# Altium PCB 2020年电赛校赛.PcbDoc (part 2 of 2)
Units mil, origin at the board's own origin, x right, y up, seen from the top; angles counter-clockwise.
Board outline 6325.03 x 2765.03 mil, 2 copper layers (Top Layer, Bottom Layer); 190 components, 62 nets, 601 pads, 1 vias.
Unrouted connection lines stored in the file: 82.
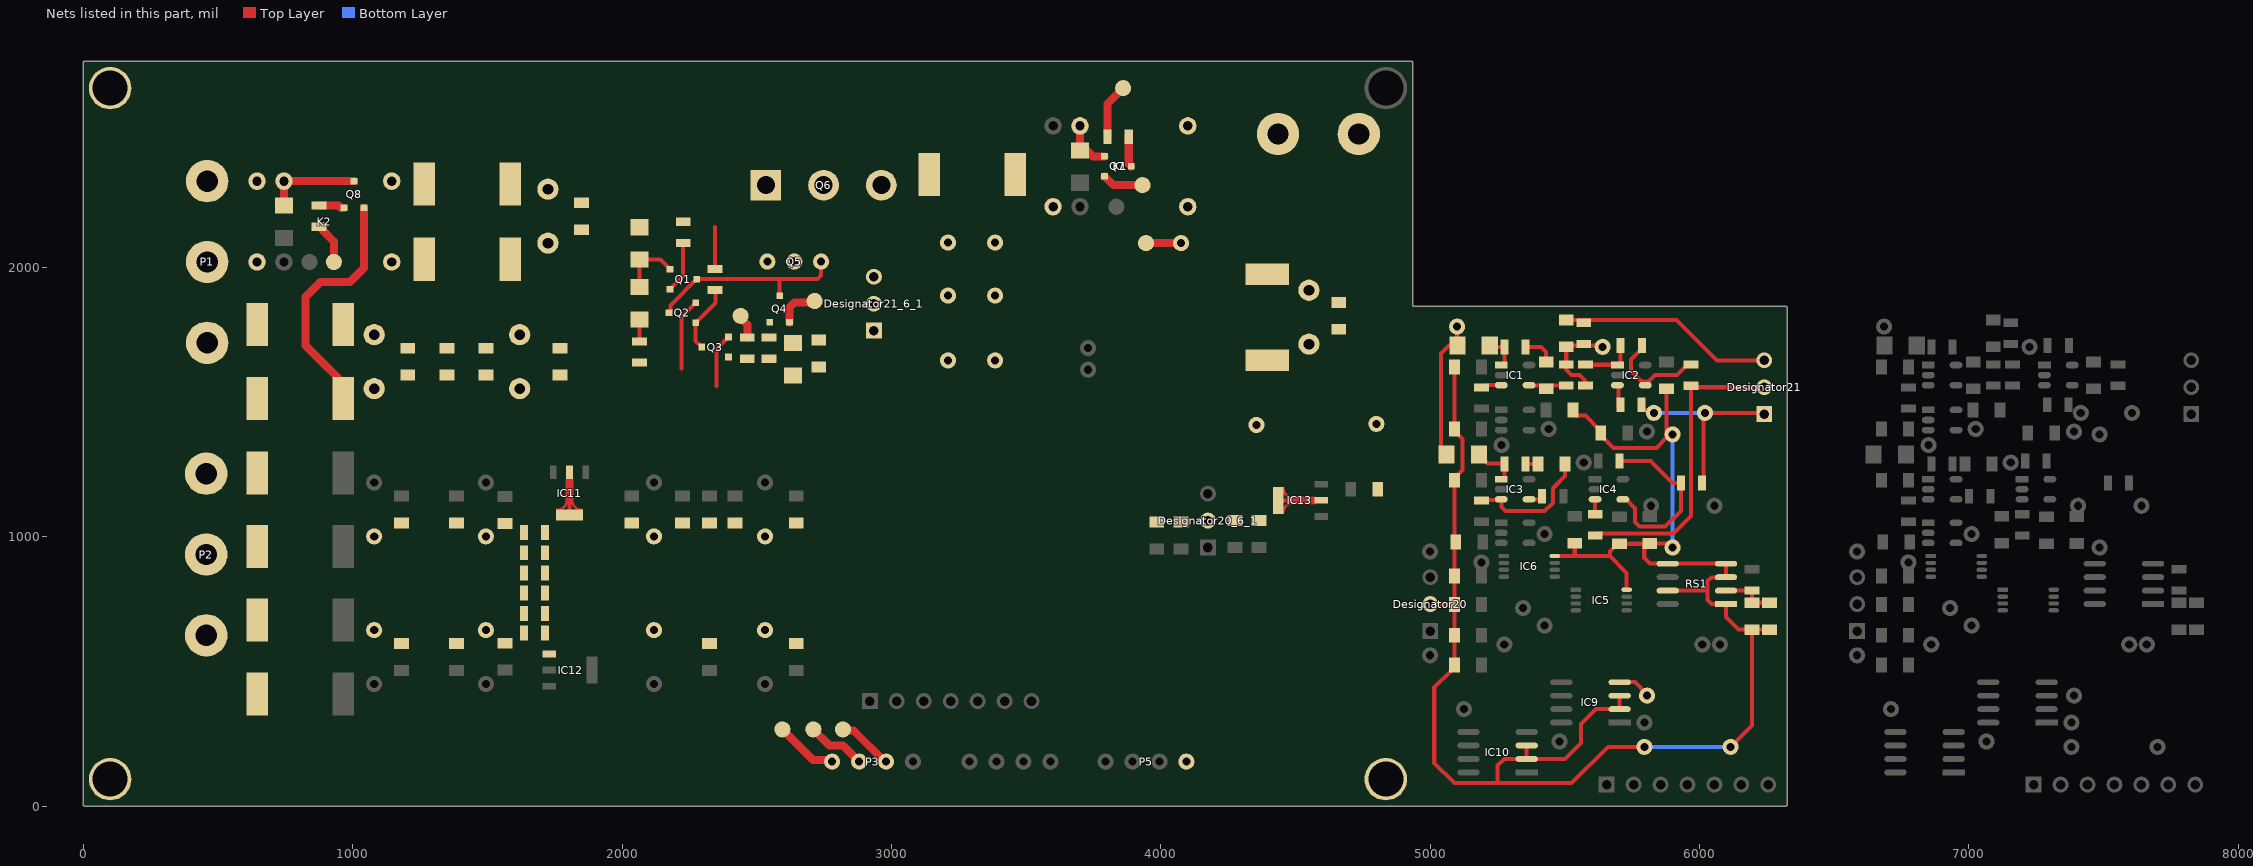
[diagram p2: the nets of this part, all layers, seen from the top]

## Via types
v1: diameter 50, hole 28, Top Layer to Bottom Layer, 1 vias

## Nets (pads, with @x,y where several pads share a name; then routed paths per layer and width w, separated by ;. In a path a pad name is that pad's centre, name@x,y a point inside that pad or via, vN(x,y) a via of type N, cw(c..) or ccw(c..) an arc to the next point about the centre after c; other vN are vias at no path point) (continued)
GND: C1.2 C2.1 C3.1 C5.1 C6.1 C7.1 C8.1 C11.1 C12.1 C13.1 C14.1 C17.2 C18.2 C19.1 C20.1 C21.1 C22.1 C25.1 C26.1 C27.2 C28.2 C29.2 C30.2 C31.1 C32.1 C33.1 C34.1 C35.2 C36.2 C37.1 C38.1 C39.1 C40.1 C41.1 C42.2 C43.2 C44.2 C45.2 C46.2 C47.1 C48.1 C49.1 C50.1 C51.2 C52.2 C54.1 C56.1 C57.1 C58.1 C60.1 C61.1 D3.2 D12.1 D13.1 Designator20.2 Designator20_6_1.2 Designator21.1 Designator21_6_1.3@2935,1765 IC5.8 IC6.8 IC9.2 IC9.3 IC10.2 IC10.3 IC11.2 IC12.1 IC13.2 L2.1 L2.2 L3.1 L3.2 L4.1 L4.2 L5.1 L5.2 L6.1 L6.2 L7.1 L7.2 P2.2 P5.1 pad.72@5900,1380 pad.79@6020,1460 pad.80@5830,1460 pad.89@5900,960 pad.97@5795,220 pad.98@6115,220 pad.110@100,100 pad.110@100,2665 pad.110@4835,100 pad.115 pad.116 pad.117 Q2.3 Q3.3 Q7.3 Q8.3 R3.1 R5.1 R6.1 R7.1 R15.1 R21.1 R23.2 RS1.1 RS1.3 RS1.4 RS1.5 RS1.7 | length 8919.5
  Top Layer w15: 2220,1625 2220,1814.97 Q2.3@2273.15,1868.12 ; 2350,1560 2350,1696.05 Q3.3@2395.11,1741.16 ; Designator20.2@5000,750 5088.98,750 C58.1@5090,748.98 ; C7.1@5090,1630 C22.1@5090,1400 5090,1392.5 5120,1362.5 5120,1247.5 5090,1217.5 C5.1@5090,1210 C18.2@5090,854.08 C58.1@5090,748.98 ; IC10.3@5358.27,225 IC10.2@5358.27,175 ; IC6.8@5462.66,928.39 5535,928.39 ; C8.1@5530,1470 5530,1462.5 5542.5,1450 5575.93,1450 5629.07,1396.86 5629.07,1389.36 C12.1@5633.14,1385.29 5645.64,1372.79 5645.64,1364.36 5680,1330 5840,1330 5877.73,1367.73 C11.1@5877.73,1548.98 ; C19.1@5536.61,975.87 5536.61,929.99 5535,928.39 ; IC9.3@5703.27,410 IC9.2@5703.27,360 5615,360 5560,305 5560,235 5500,175 IC10.2@5358.27,175 ; IC5.8@5717.3,804.27 IC5.8@5718.18,803.39 ; IC5.8@5729.49,803.39 5729.49,865.51 5666.61,928.39 ; R21.1@5785,1489.59 R21.1@5784.38,1490.21 5784.38,1477.71 5791.88,1470.21 5804.38,1470.21 5805.98,1468.61 5821.39,1468.61 pad.80@5830,1460 ; pad.97@5795,220 5660,220 5525,85 5250,85 ; C13.1@5815,975 5872.82,975 5887.82,960 pad.89@5900,960 ; RS1.7@5881.73,800 6030,800 ; R15.1@6015,1225 pad.79@6015,1475 ; pad.79@6020,1460 6235,1460 Designator21.1@6240,1455 ; pad.98@6115,220 6195,300 C56.1@6195,655 ; C57.1@6260,655 C56.1@6195,655 ; C58.1@5090,748.98 C17.2@5090,634.13 C21.1@5090,523.43 5077.5,510.93 5077.5,502.5 5015,440 5015,160 5090,85 5250,85 ; 5250,85 5250,150 5275,175 IC10.2@5358.27,175 ; 5535,928.39 5666.61,928.39 ; 5666.61,928.39 5666.61,945.17 5695.51,974.07 C14.1@5703.01,974.07 5703.07,974.02 5794.57,974.02 5794.62,973.96 5794.62,920.38 5815,900 RS1.5@5881.73,900 RS1.4@6098.27,900 RS1.3@6098.27,850 6097,848.73 6043.73,848.73 6030,835 6030,800 ; 6030,800 6030,765 6045,750 RS1.1@6098.27,750 6098.27,701.73 6145,655 C56.1@6195,655
  Top Layer w30: D12.1@957.7,1577.7 862.7,1672.7 862.3,1672.7 825,1710 825,1890 880,1945 990,1945 1042,1997 Q8.3@1042,2221 ; Q7.3@3791,2338 3824,2305 pad.115@3931.88,2305
  Bottom Layer w15: pad.97@5795,220 pad.98@6115,220 ; pad.80@5830,1460 pad.79@6020,1460 ; pad.89@5900,960 pad.72@5900,1380
Limit: P3.3 pad.105 pad.112 R4.1 | length 310.7
  Top Layer w30: pad.112@2440,1820 2440,1811.88 2465,1786.88 R4.1@2465,1739.38 ; pad.105@2710,285 2770,225 2820,225 P3.3@2880,165
NetC3_2: C3.2 D3.1 Q4.1 R5.2
NetC4_1: C4.1 R11.2 | length 45.6
  Top Layer w15: R11.2@5354.36,1270 C4.1@5400,1270
NetC4_2: C4.2 IC3.3 R13.1 | length 477.2
  Top Layer w15: R13.1@5190,1134.31 5192.7,1137 5262.02,1137 IC3.3@5263.82,1138.8 5263.82,1111.18 5280,1095 5425,1095 5455,1125 5455,1180 5500,1225 C4.2@5500,1270
NetC9_1: C9.1 R8.2 | length 122
  Top Layer w15: R8.2@5354.36,1704.2 5410.81,1704.2 5430,1685 5430,1660.7 C9.1@5440,1650.7
NetC9_2: C9.2 IC1.4 R9.1 | length 175.5
  Top Layer w15: IC1.4@5366.97,1562.6 5367.96,1561.61 C9.2@5413.93,1561.61 ; C9.2@5418.55,1561.6 5423.95,1556.2 C9.2@5431.05,1549.1 ; C9.2@5429.23,1561.48 5414.06,1561.48 C9.2@5413.93,1561.61 ; R9.1@5509.01,1561.61 5429.23,1561.61 C9.2@5413.93,1561.61
NetC10_2: C10.2 C15.1 C16.2 D6.1 D7.2 Designator21.3 Designator21_6_1.3@2935,1965 K1.1 Q6.3 R6.2 R7.2 R17.2 | length 797.1
  Top Layer w15: C10.2@5505,1805 5570,1805 5915,1805 6065,1655 Designator21.3@6240,1655
NetC56_2: C56.2 C57.2 L1.1 RS1.2 | length 207.6
  Top Layer w15: RS1.2@6098.27,800 6098.58,800.31 6194.69,800.31 L1.1@6195,800.62 C56.2@6195,755 C57.2@6260,755
NetD1_2: D1.2 D2.1 Q1.1 | length 230.1
  Top Layer w15: D2.1@2065,1926.66 D1.2@2065,2028.98 2141.95,2028.98 Q1.1@2177.92,1993
NetD2_2: D2.2 R3.2 | length 81.3
  Top Layer w15: R3.2@2065,1725.28 D2.2@2065,1806.58
NetD4_1: D4.1 D5.1 pad.102@4075,2090 pad.102@5100,1780 pad.113 pad.114 Q4.3 | length 832.2
  Top Layer w15: D4.1@5040,1280 5040,1680 5070,1710 D5.1@5100.94,1710 5100,1710.94 pad.102@5100,1780
  Top Layer w30: Q4.3@2622,1796 Q4.3@2622,1796 2621.95,1851.69 2639.53,1869.26 2709.26,1869.26 pad.113@2715,1875 ; pad.114@3945,2090 pad.102@4075,2090
NetD4_2: D4.2 IC3.1 R11.1 | length 183.5
  Top Layer w15: D4.2@5181.02,1305 5181.02,1302 5203.52,1279.5 5206.52,1279.5 5213.52,1272.5 5275.62,1272.5 R11.1@5275.62,1270 R11.1@5275.62,1261.92 ; D4.2@5195,1305 D4.2@5200,1310 ; IC3.1@5263.82,1213.61 5270.92,1213.61 5275.62,1218.31 R11.1@5275.62,1260.59
NetD5_2: D5.2 IC1.1 R8.1 | length 136.3
  Top Layer w15: D5.2@5221.02,1710 5226.02,1705 5268.12,1705 R8.1@5272.28,1700.85 ; IC1.1@5260,1641.22 IC1.1@5263.82,1637.4 5270.92,1637.4 5275.62,1642.11 R8.1@5275.62,1704.2
NetD8_1: D8.1 K1.5 Q7.1 | length 181.7
  Top Layer w30: K1.5@3700,2525 3700,2450 3710,2450 3748,2412 Q7.1@3791,2412
NetD9_1: D9.1 K2.5 Q8.2 | length 350.9
  Top Layer w30: D9.1@745,2229.06 K2.5@745,2320 Q8.2@1005,2320
NetD10_1: D10.1 D13.2 K2.3 K2.4
NetD11_1: D11.1 D12.2 P1.1
NetD14_1: D14.1 D15.2 P2.3
NetD16_1: D16.1 D17.2 P2.1
NetIC1_3: IC1.3 R10.1 | length 77.2
  Top Layer w15: R10.1@5190,1554.38 5197.5,1561.88 5218.07,1561.88 5218.79,1562.6 IC1.3@5263.82,1562.6
NetIC2_1: IC2.1 R18.2 R19.2 | length 201.8
  Top Layer w15: R18.2@5571.16,1640.28 R18.2@5571.5,1639.94 ; R18.2@5576.18,1638.38 5694.03,1638.38 IC2.1@5695.01,1637.4 5702.12,1637.4 5706.82,1642.11 R19.2@5706.82,1710.47
NetIC2_3: IC2.3 R21.2 | length 88.7
  Top Layer w15: IC2.3@5695.01,1562.6 5698.75,1558.85 5698.75,1480.75 R21.2@5702.5,1477
NetIC2_4: IC2.4 R19.1 R20.2 | length 376.8
  Top Layer w15: R19.1@5785.56,1710.47 5785.56,1697.97 5745,1657.41 5745,1615.75 5784.54,1576.21 5811.21,1576.21 5835,1600 5915.84,1600 5955.21,1639.36 R20.2@5967.71,1639.36
NetIC3_4: IC3.4 R12.1 | length 55.5
  Top Layer w15: IC3.4@5366.97,1138.8 5408.12,1138.8 5415.62,1146.3 R12.1@5415.62,1150
NetIC4_3: IC4.3 R16.2 | length 55.8
  Top Layer w15: IC4.3@5611.96,1138.8 5611.96,1084.49 R16.2@5613.01,1083.43
NetIC4_4: IC4.4 R14.1 R15.2 | length 677.7
  Top Layer w15: R14.1@5702.51,1280.58 5820,1280.58 5820,1280 5900,1200 R15.2@5930.64,1200 5930.64,1095.64 5872.3,1037.3 5777.7,1037.3 5760,1055 5760,1105.72 5729.99,1135.73 5718.18,1135.73 IC4.4@5715.11,1138.8
NetK2_1: K2.1 P1.2
NetK2_6: K2.6 P1.3
NetQ1_2: Q1.2 Q2.2 Q4.2 Q5.3 | length 748.5
  Top Layer w15: Q2.2@2174.15,1831.12 2179.15,1836.12 2179.15,1858.22 Q1.2@2276.92,1956 2585,1956 ; Q4.2@2585,1895 2585,1956 ; Q5.3@2739.26,2021.51 2739.26,1969.26 2726,1956 2585,1956
NetQ1_3: Q1.3 R1.1 | length 191.9
  Top Layer w15: Q1.3@2177.92,1919 2226.92,1968 R1.1@2226.92,2090.62
NetQ2_1: Q2.1 Q3.2 R2.1 | length 274.3
  Top Layer w15: Q3.2@2296.11,1704.16 2273.15,1727.13 Q2.1@2273.15,1794.12 2346.11,1867.08 2346.11,1916.2 R2.1@2346.11,1921.82 ; R2.1@2341.11,1916.2 R2.1@2346.42,1921.51 ; R2.1@2346.42,1916.51 R2.1@2353.03,1923.12
NetQ3_1: Q3.1 R4.2
NetQ5_1: Q5.1 Q6.1 | length 8
  Top Layer w15: Q6.1@2533.59,2305 Q6.1@2539.26,2299.33
NetQ7_2: Q7.2 R22.1 | length 113.8
  Top Layer w30: R22.1@3880.88,2485.07 3880.88,2384.12 Q7.2@3890,2375
NetQ8_1: Q8.1 R24.1 | length 98.1
  Top Layer w15: R24.1@875,2229.38 R24.1@876.19,2228.19
  Top Layer w30: R24.1@875,2229.38 947.5,2229.38 955.88,2221 Q8.1@968,2221
OFF: P3.2 pad.106 pad.111 R22.2 | length 413.6
  Top Layer w30: pad.106@2820,285 2825,280 2860,280 2975,165 P3.2@2980,165 ; R22.2@3802.14,2485.07 3802.14,2607.14 pad.111@3860,2665
SW: P3.4 pad.104 pad.109 R24.2 | length 395.4
  Top Layer w30: R24.2@875,2150.64 887.5,2150.64 887.5,2138.14 930,2095.64 pad.109@930,2020 ; pad.104@2595,285 2709.26,170.74 2774.26,170.74 P3.4@2780,165
Uout+: K1.3 K1.4 P6.2
Uout-: C15.2 C16.1 D7.1 Designator21.2 Designator21_6_1.2 P6.1 R16.1 R20.1 R23.1 | length 1142.5
  Top Layer w15: R16.1@5613.01,1004.69 5620.51,1012.19 5641.29,1012.19 5641.8,1012.7 5902.7,1012.7 5967.71,1077.71 5967.71,1555 R20.1@5967.71,1560.62 5973.33,1555 Designator21.2@6240,1555
V+: C1.1 C2.2 C29.1 C30.1 C31.2 C32.2 C33.2 C34.2 D1.1 D6.2 D10.2 D11.2 Q5.2 Q6.2 R1.2 R2.2 | length 155.6
  Top Layer w15: R2.2@2345,1994.36 2345,2150
VIN: C10.1 IC9.4 pad.73@5640,1705 pad.93@5805,410 R9.2 R17.1 R18.1 | length 432.9
  Top Layer w15: R9.2@5500,1634.84 5505,1629.84 5505,1620 5525,1600 5555,1600 5575,1580 5575,1562.44 R18.1@5576.18,1561.26 ; R9.2@5504.99,1639.69 C10.1@5505,1705 ; C10.1@5525,1710.31 5569.68,1710.31 R17.1@5570,1710.62 ; R17.1@5570,1715.62 5575.31,1710.31 5634.69,1710.31 pad.73@5640,1705 ; IC9.4@5703.27,460 5760,460 5805,415 pad.93@5805,410
pads on no net: C4_1.1 C4_1.2 C5_1.1 C5_1.2 C7_1.1 C7_1.2 C8_1.1 C8_1.2 C9_1.1 C9_1.2 C10_1.1 C10_1.2 C11_1.1 C11_1.2 C12_1.1 C12_1.2 C13_1.1 C13_1.2 C14_1.1 C14_1.2 C17_1.1 C17_1.2 C18_1.1 C18_1.2 C19_1.1 C19_1.2 C20_1.1 C20_1.2 C21_1.1 C21_1.2 C22_1.1 C22_1.2 C56_1.1 C56_1.2 C57_1.1 C57_1.2 C58_1.1 C58_1.2 D4_1.1 D4_1.2 D5_1.1 D5_1.2 Designator19_1.1 Designator19_1.2 Designator19_1.3 Designator19_1.4 Designator19_1.5 Designator19_1.6 Designator19_1.7 Designator20_1.1 Designator20_1.2 Designator20_1.3 Designator21_1.1 Designator21_1.2 Designator21_1.3 IC1_1.1 IC1_1.2 IC1_1.3 IC1_1.4 IC1_1.5 IC2_1.1 IC2_1.2 IC2_1.3 IC2_1.4 IC2_1.5 IC3_1.1 IC3_1.2 IC3_1.3 IC3_1.4 IC3_1.5 IC4_1.1 IC4_1.2 IC4_1.3 IC4_1.4 IC4_1.5 IC5_1.1 IC5_1.2 IC5_1.3 IC5_1.4 IC5_1.5 IC5_1.6 IC5_1.7 IC5_1.8 IC6_1.1 IC6_1.2 IC6_1.3 IC6_1.4 IC6_1.5 IC6_1.6 IC6_1.7 IC6_1.8 IC7_1.1 IC7_1.2 IC7_1.3 IC7_1.4 IC7_1.5 IC8_1.1 IC8_1.2 IC8_1.3 IC8_1.4 IC8_1.5 IC9_1.1 IC9_1.2 IC9_1.3 IC9_1.4 IC9_1.5 IC9_1.6 IC9_1.7 IC9_1.8 IC10_1.1 IC10_1.2 IC10_1.3 IC10_1.4 IC10_1.5 IC10_1.6 IC10_1.7 IC10_1.8 K1.6 L1_1.1 L1_1.2 R8_1.1 R8_1.2 R9_1.1 R9_1.2 R10_1.1 R10_1.2 R11_1.1 R11_1.2 R12_1.1 R12_1.2 R13_1.1 R13_1.2 R14_1.1 R14_1.2 R15_1.1 R15_1.2 R16_1.1 R16_1.2 R17_1.1 R17_1.2 R18_1.1 R18_1.2 R19_1.1 R19_1.2 R20_1.1 R20_1.2 R21_1.1 R21_1.2 RS1.8 RS1_1.1 RS1_1.2 RS1_1.3 RS1_1.4 RS1_1.5 RS1_1.6 RS1_1.7 RS1_1.8
copper on no net: | length 36832.4
  Top Layer w15: 2935,1765 2940,1770 ; 6585,560 6585,650 ; 6585,750 6673.98,750 6675,748.98 ; 6585,850 6585,945 ; 6625,1280 6625,1680 6655,1710 6685.94,1710 6685,1710.94 6685,1780 ; 6675,1630 6675,1400 6675,1392.5 6705,1362.5 6705,1247.5 6675,1217.5 6675,1210 6675,854.08 6675,748.98 ; 6710,360 6660,310 6660,211.22 6696.22,175 6726.73,175 6757.24,175 6825,242.76 6825,330 6855,360 7071.73,360 ; 6726.73,225 6757.24,225 6795,262.76 6795,365 6840,410 7071.73,410 7145,410 7180,445 7180,485 7225,530 7345,530 7450,425 7450,185 7420,155 7315,155 7262.03,102.03 7240,80 ; 6726.73,275 6755.44,275 6758.52,278.07 6758.52,281.59 6770,293.07 6770,400 6850,480 6955,480 7055,580 7365,580 7510,435 7510,150 7440,80 ; 6766.02,1305 6766.02,1302 6788.52,1279.5 6791.52,1279.5 6798.52,1272.5 6860.62,1272.5 6860.62,1270 6860.62,1261.92 ; 6775,748.98 6781.02,748.98 6785,745 6860,745 ; 6775,854.08 6775,846.58 6725,796.58 6725,691.63 6775,641.63 6775,634.13 6775,523.43 ; 6775,1055.57 6776.87,1053.7 6846.95,1053.7 6848.82,1051.83 6853.52,1047.13 6902.85,1047.13 6927.85,1022.13 6934.99,1015.01 6950,1000 6950,979 6951.97,977.03 6942.7,977.03 ; 6775,1134.31 6777.7,1137 6847.02,1137 6848.82,1138.8 6848.82,1111.18 6865,1095 7010,1095 7040,1125 7040,1180 7085,1225 7085,1270 ; 6775,1400 6775,1407.5 ; 6775,1475.64 6777.47,1473.17 6846.36,1473.17 6848.82,1470.71 6853.52,1466.01 6898.99,1466.01 6950,1415 6950,1397.87 6951.97,1395.91 ; 6775,1554.38 6782.5,1561.88 6803.07,1561.88 6803.79,1562.6 6848.82,1562.6 ; 6780,1305 6785,1310 ; 6806.02,1710 6811.02,1705 6853.12,1705 6857.28,1700.85 ; 6839.55,1395.91 6848.82,1395.91 6849.41,1395.32 6849.41,1340.59 6850,1340 ; 6845,1641.22 6848.82,1637.4 6855.92,1637.4 6860.62,1642.11 6860.62,1704.2 ; 6848.82,977.03 6834.99,977.03 6821.5,963.54 6821.5,886.01 6830.29,877.23 6858.66,877.23 ; 6848.82,1213.61 6855.92,1213.61 6860.62,1218.31 6860.62,1260.59 ; 6848.82,1600 6797.5,1600 6775,1622.5 6775,1630 6740,1630 6720,1610 6720,1462.5 6775,1407.5 ; 6858.69,851.61 6858.69,877.2 ; 6858.71,902.77 6887.23,902.77 6940,850 6940,805 ; 6858.7,928.37 6901.63,928.37 6970,860 6970,812.17 6978.79,803.39 7125.51,803.39 ; 6860,600 6860,745 ; 6930,735 6934.41,739.41 7125.51,739.41 ; 6939.36,1270 6985,1270 ; 6939.36,1704.2 6995.81,1704.2 7015,1685 7015,1660.7 7025,1650.7 ; 6943.27,125 7075,125 7175,225 7175,295 7190,310 7288.27,310 7380,310 ; 6943.27,225 6943.27,175 ; 6943.27,275 7025.75,275 7060.75,240 7065,240 ; 6951.97,1051.83 7004.02,1051.83 ; 6951.97,1138.8 6993.12,1138.8 7000.62,1146.3 7000.62,1150 ; 6951.97,1213.61 7018.61,1213.61 7028.79,1223.79 7028.79,1396.21 7021.97,1403.03 7021.97,1463.03 7015,1470 ; 6951.97,1562.6 6952.96,1561.61 6998.93,1561.61 ; 6951.97,1637.4 6902.6,1637.4 6900,1640 ; 7003.55,1561.6 7008.95,1556.2 7016.05,1549.1 ; 7009.29,1470.71 6949.53,1470.71 6945.18,1475.06 6945.18,1494.82 6900,1540 6900,1640 ; 7010,1010 7004.02,1015.98 7004.02,1051.83 ; 7014.23,1561.48 6999.06,1561.48 6998.93,1561.61 ; 7047.66,851.61 7213.03,851.61 7227.3,837.34 7227.3,752.7 7275,705 7540,440 7540,80 ; 7047.66,877.2 7222.8,877.2 7252.3,847.7 7252.3,782.44 7282.52,752.23 7314.51,752.23 ; 7047.66,902.8 7237.2,902.8 7277.3,862.7 7277.3,792.79 7292.28,777.82 7314.47,777.82 7314.51,777.77 7347.58,777.77 7375,750.36 7375,710 7630,455 7630,195 7665,160 7760,160 7840,80 ; 7047.66,928.39 7120,928.39 ; 7070,462.6 7070,525 7100,555 7355,555 7480,430 7480,170 7440,130 7390,130 7340,80 ; 7071.73,310 6870,310 6855,295 6855,222.76 6757.24,125 6726.73,125 6696.22,125 6630,191.22 6630,370 6762.5,502.5 6762.5,510.93 6775,523.43 ; 7079.36,1150 7115,1150 7130,1165 7130,1200 7145,1215 7195.56,1215 7196.96,1213.61 7200.3,1213.61 7205,1218.31 7205,1276.8 7208.77,1280.58 7203.2,1275 7155,1275 ; 7085,1634.84 7090,1629.84 7090,1620 7110,1600 7140,1600 7160,1580 7160,1562.44 7161.18,1561.26 ; 7089.99,1639.69 7089.99,1704.99 ; 7090,1805 7155,1805 7500,1805 7650,1655 7825,1655 ; 7094.01,1561.61 7014.23,1561.61 6998.93,1561.61 ; 7110,1710.31 7154.68,1710.31 7155,1710.62 ; 7115,1470 7115,1462.5 7127.5,1450 7160.93,1450 7214.07,1396.86 7214.07,1389.36 7218.14,1385.29 7230.64,1372.79 7230.64,1364.36 7265,1330 7425,1330 7462.73,1367.73 7462.73,1548.98 ; 7121.61,975.87 7121.61,929.99 7120,928.39 ; 7121.61,1075.87 7028.06,1075.87 7004.02,1051.83 ; 7125.51,726.61 7125.51,739.41 ; 7125.51,752.2 7125.51,739.41 ; 7125.51,777.8 6967.2,777.8 6940,805 ; 7125.53,803.37 7156.63,803.37 7175,785 7175,695 7150,670 7010,670 7010,580 6953.43,523.43 6775,523.43 ; 7155,1715.62 7160.31,1710.31 7219.69,1710.31 7225,1705 ; 7156.16,1640.28 7156.5,1639.94 ; 7161.18,1638.38 7279.03,1638.38 7280.01,1637.4 7287.12,1637.4 7291.82,1642.11 7291.82,1710.47 ; 7196.96,1138.8 7196.96,1084.49 7198.01,1083.43 ; 7196.96,1176.21 7198.76,1174.4 7249.41,1174.4 7250,1175 ; 7198.01,1004.69 7205.51,1012.19 7226.29,1012.19 7226.8,1012.7 7487.7,1012.7 7552.71,1077.71 7552.71,1555 7552.71,1560.62 7558.33,1555 7825,1555 ; 7275.51,1061.57 7288.01,1074.07 7280.51,1074.07 ; 7280.01,1562.6 7283.75,1558.85 7283.75,1480.75 7287.5,1477 ; 7287.51,1280.58 7405,1280.58 7405,1280 7485,1200 7515.63,1200 7515.64,1095.64 7457.3,1037.3 7362.7,1037.3 7345,1055 7345,1105.72 7314.99,1135.73 7303.18,1135.73 7300.11,1138.8 ; 7288.27,410 7288.27,360 7200,360 7145,305 7145,235 7085,175 6943.27,175 ; 7288.27,460 7345,460 7390,415 7390,410 ; 7300.11,1213.61 7311.92,1213.61 7379.62,1145.9 7379.62,1073.96 ; 7302.3,804.27 7303.18,803.39 ; 7314.49,726.61 7314.49,700.51 7570,445 7570,145 7635,80 7640,80 ; 7314.51,752.18 7314.71,751.99 7338.01,751.99 7350,740 7350,700 7600,450 7600,175 7645,130 7685,130 7735,80 7740,80 ; 7314.49,803.39 7314.49,865.51 7251.61,928.39 ; 7318.14,1388.17 7330,1400.03 7330,1580.4 7312.2,1598.2 7281.81,1598.2 7280.01,1600 7245,1600 7225,1580 7225,1545 7200,1520 7085,1520 7065,1500 7065,1440 7172.06,1332.94 7222.06,1332.94 7250,1305 7250,1175 ; 7322.85,1390 7390,1390 ; 7370,1489.59 7369.38,1490.21 7369.38,1477.71 7376.88,1470.21 7389.38,1470.21 7390.98,1468.61 7406.39,1468.61 7415,1460 ; 7370.56,1710.47 7370.56,1697.97 7330,1657.41 7330,1615.75 7369.54,1576.21 7396.21,1576.21 7420,1600 7500.84,1600 7540.21,1639.36 7552.71,1639.36 ; 7380,220 7245,220 7110,85 6835,85 ; 7383.16,1637.4 7384.96,1639.2 7452.96,1639.2 7462.88,1649.12 7462.88,1715.75 7423.63,1755 6915,1755 6900,1740 6900,1640 ; 7400,975 7457.82,975 7472.82,960 7485,960 ; 7466.73,800 7615,800 ; 7466.73,850 7465.46,848.73 7413.73,848.73 7400,835 7400,720 7520,600 7595,600 7660,600 ; 7600,1225 7600,1475 ; 7605,1460 7820,1460 7825,1455 ; 7640,1115 7780,975 7780,879.36 ; 7683.27,800 7683.58,800.31 7779.68,800.31 7780,800.62 7780,755 7845,755 ; 7700,220 7780,300 7780,655 ; 7845,655 7780,655 ; 6675,748.98 6675,634.13 6675,523.43 6662.5,510.93 6662.5,502.5 6600,440 6600,160 6675,85 6835,85 ; 6775,1407.5 6800.81,1433.31 6848.82,1433.31 6886.69,1433.31 6894.99,1425.01 6900,1420 6900,1190 6888.01,1178.01 6850.62,1178.01 6848.82,1176.2 6801.3,1176.2 6775,1202.5 6775,1210 6740,1210 6720,1190 6720,1000 6735.01,984.99 6740,980 6780,980 6780,987.5 6805.13,1012.63 6847.02,1012.63 6848.82,1014.43 6850.62,1012.63 6887.37,1012.63 6900,1000 6900,974.28 6926.96,947.32 7017.32,947.32 7095,1025 7145,1025 7165,1045 7251.44,1045 7280.51,1074.07 ; 6835,85 6835,150 6860,175 6943.27,175 ; 6860,745 6860,780 6890,810 6935,810 6940,805 ; 7120,928.39 7251.61,928.39 ; 7250,1175 7250,1104.58 7280.51,1074.07 ; 7251.61,928.39 7251.61,945.17 7280.51,974.07 7288.01,974.07 7288.07,974.02 7379.57,974.02 7379.62,973.96 7379.62,920.38 7400,900 7466.73,900 7683.27,900 7683.27,850 7682,848.73 7628.73,848.73 7615,835 7615,800 ; 7615,800 7615,765 7630,750 7683.27,750 7683.27,701.73 7730,655 7780,655
  Bottom Layer w15: 6585,560 6585,485 6710,360 ; 6585,945 6735,945 6775,905 ; 6850,1340 6850,1095 6930,1015 6930,735 ; 6860,600 7595,600 ; 7010,670 7010,1010 7010,1090 7025,1105 7025,1400 ; 7380,220 7700,220 ; 7380,310 7440,310 7660,530 7660,600 ; 7405,1115 7405,925 7435,895 7605,895 7640,930 7640,1115 ; 7415,1460 7605,1460 ; 7485,960 7485,1380

## Polygon pours and split planes (outlines as drawn)
GND on Top Layer "GND_L01_P032" (solid, pour order 32): 2220,1660 2234.99,1660 2294.99,1600 2480,1600 2535,1655 2770,1655 2955,1470 4595,1470 4735,1330 4920,1145 4920,55 4880,15 510,15 240,285 855,285 2470,285 2670,85 4015,85 4060,130 4060,760 4170,870 4545,870 4780,1105 4780,1200 4675,1305 4235,1305 4150,1390 2050,1390 2050,1655 2055,1660
GND on Top Layer "GND_L01_P002" (solid, pour order 2): 925,1615 925,1420 955,1390 2050,1390 2235,1575 2235,1660 1875,1660 1830,1615
+15V on Top Layer "+15V_L01_P059" (solid, pour order 59): 4576.46,1270 4636.46,1210 4720,1210 4730,1200 4730,1145 4720,1135 4680,1135 4640,1175 4570,1175 4560,1185 4560,1235 4550,1245 4575,1270
GND on Top Layer "GND_L01_P058" (solid, pour order 58): 3125,1735 3005,1735 2980,1760 2980,1790 2965,1805 2905,1805 2890,1790 2890,1680 2865,1655 2770,1655 2750,1635 2940,1445 3125,1445
GND on Top Layer "GND_L01_P057" (solid, pour order 57): 3125,1735 3470,1735 3485,1720 3485,1485 3500,1470 3500,1450 3095,1450 3095,1470 3110,1485 3110,1720
NetC3_2 on Top Layer "NETC3_2_L01_P055" (solid, pour order 55): 2540,1815 2515,1790 2515,1720 2525,1710 2760,1710 2765,1715 2765,1755 2760,1760 2585,1760 2575,1770 2575,1810 2570,1815
NetQ3_1 on Top Layer "NETQ3_1_L01_P054" (solid, pour order 54): 2385,1685 2380,1680 2380,1655 2395,1640 2490,1640 2500,1650 2500,1670 2485,1685
Uout- on Top Layer "UOUT-_L01_P052" (solid, pour order 52): 4300,1495 4320,1515 4295,1540 4270,1515 3665,1515 3625,1555 3625,1705 3520,1810 3095,1810 3005,1900 2910,1900 2895,1885 2895,1845 2910,1830 3030,1830 3075,1785 3510,1785 3600,1695 3600,1550 3655,1495
no net on Top Layer "NONET_L01_P050" (solid, pour order 50): 4300,1495
NetC10_2 on Top Layer "NETC10_2_L01_P049" (solid, pour order 49): 3575,2125 3640,2060 3675,2025 4710,2025 4725,2010 4725,1865 4710,1850 3635,1850 3467.5,2017.5
Uout- on Top Layer "UOUT-_L01_P048" (solid, pour order 48): 4780,2580 4635,2580 4610,2555 4610,2180.03 4760,2030.03 4760,1830 4720,1790 4305,1790 4280,1765 4280,1515 4300,1495 4600,1495 4710,1385 4895,1200 4910,1200 4920,1210 4920,2440
no net on Top Layer "NONET_L01_P047" (solid, pour order 47): 4735,2595
Uout+ on Top Layer "UOUT+_L01_P046" (solid, pour order 46): 4535,2745 4550,2730 4550,2185 4535,2170 4025,2170 4010,2185 4010,2730 4025,2745
NetC10_2 on Top Layer "NETC10_2_L01_P045" (solid, pour order 45): 2890,2500 2930,2540 3180,2540 3220,2500 3220,2245 3285,2180 3525,2180 3550,2205 3550,2265 3575,2290 3620,2290 3640,2270 3640,2060 3585,2005 3080,2005 3000,1925 2905,1925 2890,1940
V+ on Top Layer "V+_L01_P044" (solid, pour order 44): 2785,2750 3465,2750 3515,2700 3515,2255 3485,2225 3395,2225 3345,2275 3345,2545 3295,2595 2890,2595 2825,2530 2785,2530
-5V(A) on Top Layer "-5V(A)_L01_P043" (solid, pour order 43): 3765,715 3765,680 3745,660 3025,660 2795,430 2675,430 2675,525 2810,525 3020,735 3745,735
+5V on Top Layer "+5V_L01_P042" (solid, pour order 42): 3960,140 3970,130 4020,130 4030,140 4030,940 3960,940
-5V(A) on Top Layer "-5V(A)_L01_P041" (solid, pour order 41): 3680,1750 3780,1750 3795,1735 3795,1590 3775,1570 3680,1570 3665,1585 3665,1735
+5V on Top Layer "+5V_L01_P039" (solid, pour order 39): 3955,990 3945,980 3945,935 3955,925 4500,925 4635,1060 4635,1085 4625,1095 4555,1095 4520,1060 4520,1010 4500,990
no net on Top Layer "NONET_L01_P038" (solid, pour order 38): 4160,995
no net on Top Layer "NONET_L01_P037" (solid, pour order 37): 4160,995
GND on Top Layer "GND_L01_P036" (solid, pour order 36): 2665,1075 3920,1075 3945,1100 4445,1100 4445,1020 2740,1020 2700,980 2665,980
+5V(A) on Top Layer "+5V(A)_L01_P033" (solid, pour order 33): 2670,1295 4035,1295 4135,1195 4200,1195 4215,1180 4215,1140 4200,1125 4130,1125 3990,1265 2745,1265 2704.93,1224.93 2670,1224.93
no net on Top Layer "NONET_L01_P031" (solid, pour order 31): 2235,1660
+15V on Top Layer "+15V_L01_P030" (solid, pour order 30): 1805,1355 4095,1355 4180,1270 4580,1270 4580,1250 4575,1245 4165,1245 4080,1330 1825,1330 1730,1235 1707.5,1257.5
no net on Top Layer "NONET_L01_P029" (solid, pour order 29): 2755,2510
NetQ5_1 on Top Layer "NETQ5_1_L01_P028" (solid, pour order 28): 2480,2380 2460,2360 2460,2040 2515,1985 2565,1985 2575,1995 2575,2215 2610,2250 2610,2360 2590,2380
V+ on Top Layer "V+_L01_P027" (solid, pour order 27): 2720,2195 2600,2075 2600,1995 2615,1980 2665,1980 2680,1995 2680,2075 2795,2190 2795,2235 2720,2235
GND on Top Layer "GND_L01_P026" (solid, pour order 26): 1480,2445 1535,2390 1535,2235 1550,2220 1880,2220 1900,2240 1900,2665 1814.97,2750.03 310,2750 310,2445
no net on Top Layer "NONET_L01_P025" (solid, pour order 25): 350,2440
NetK2_6 on Top Layer "NETK2_6_L01_P024" (solid, pour order 24): 690,2250 665,2225 385,2225 360,2250 360,2385 385,2410 665,2410 690,2385
-15V on Top Layer "-15V_L01_P023" (solid, pour order 23): 1787.5,520 1787.5,490 1670,490 1650,470 1635,470 1635,520
-15V on Top Layer "-15V_L01_P004" (solid, pour order 4): 900,770 1005,770 1010,765 1010,565 1055,520 1650,520 1650,445 1555,350 1060,350 1025,315 930,315 900,345
+5V(A) on Top Layer "+5V(A)_L01_P022" (solid, pour order 22): 1850,1295 1850,1155 1875,1130 2685,1130 2705,1150 2705,1295
GND on Top Layer "GND_L01_P021" (solid, pour order 21): 900,830 900,855 865,890 865,1300 955,1390 980,1415 930,1465 800,1335 800,830
GND on Top Layer "GND_L01_P020" (solid, pour order 20): 1020,800 1045,775 1055,775 1055,880 1045,880 1020,855 800,855 800,635 735,570 735,310 710,285 460,285 305,440 305,750 360,805 455,805 545,895 545,975 480,1040 365,1040 269.92,1135.08 270.02,2375.02 340,2445 340,2750 60,2750 15,2705 15,55 55,15 615,15 860,260 860,765 895,800
no net on Top Layer "NONET_L01_P014" (solid, pour order 14): 1705,1090
no net on Top Layer "NONET_L01_P016" (solid, pour order 16): 1705,460
-5V(A) on Top Layer "-5V(A)_L01_P017" (solid, pour order 17): 1700,460 1700,430 1775,355 2700,355 2700,515 2690,525 1950,525 1940,515 1940,430 1930,420 1795,420 1755,460
GND on Top Layer "GND_L01_P015" (solid, pour order 15): 1705,1075 2705,1075 2705,580 1970,580 1910,580 1785,580 1755,550 1705,550
NetK2_1 on Top Layer "NETK2_1_L01_P012" (solid, pour order 12): 670,1925 690,1945 690,2095 670,2115 385,2115 360,2090 360,1950 385,1925
NetD11_1 on Top Layer "NETD11_1_L01_P011" (solid, pour order 11): 680,1885 700,1865 700,1440 680,1420 605,1420 360,1665 360,1755 420,1815 490,1885
NetD16_1 on Top Layer "NETD16_1_L01_P010" (solid, pour order 10): 610,1060 680,1060 700,1040 700,900 542.18,742.18 542.18,562.82 595,510 680,510 700,490 700,345 690,335 540,335 365,510 365,740 440,740 590,890 590,1040
NetD14_1 on Top Layer "NETD14_1_L01_P008" (solid, pour order 8): 350,1190 350,1285 395,1330 675,1330 775,1230 775,695 680,600 615,600 595,620 595,760 615,780 635,780 735,880 735,1050 640,1145 395,1145
GND on Top Layer "GND_L01_P005" (solid, pour order 5): 1070,1065 1045,1040 1045,630 1085,590 1645,590 1645,1065
+15V on Top Layer "+15V_L01_P003" (solid, pour order 3): 900,1295 945,1340 1030,1340 1065,1305 1757.88,1305 1757.88,1135 1095,1135 1010,1050 1010,890 1005,885 900,885
V+ on Top Layer "V+_L01_P000" (solid, pour order 0): 925,1885 925,1690 1905,1690 1905,1990 2085,2170 2375,2170 2375,2390 2425,2440 2670,2440 2685,2425 2685,2260 2720,2225 2795,2225 2825,2255 2825,2730 2805,2750 2520,2750 1920,2150 1550,2150 1475,2075 1475,1945 1415,1885
NetD10_1 on Top Layer "NETD10_1_L01_P001" (solid, pour order 1): 1305,2395 1110,2395 1110,1950 1305,1950

## Silkscreen, mask and mechanical layers (free items; w line width, h text height)
Mechanical 1:
  lines w10: 6515,1845 6515,5 ; 2855,315 4245,315 ; 2855,315 2855,2160 ; 2855,315 2855,2160 ; 2855,315 4245,315 ; 2855,2160 4245,2160 ; 2855,2160 4245,2160 ; 4245,315 4245,2160 ; 4245,315 4245,2160 ; 4930,5 4930,1850 6320,1850 6320,5 4930,5 ; 4930,5 4930,2760 5,2760 5,5 4930,5 ; 6515,5 6515,1850 7905,1850 7905,5 6515,5